# EAGLE board SCH (EAGLE 9.6.2)
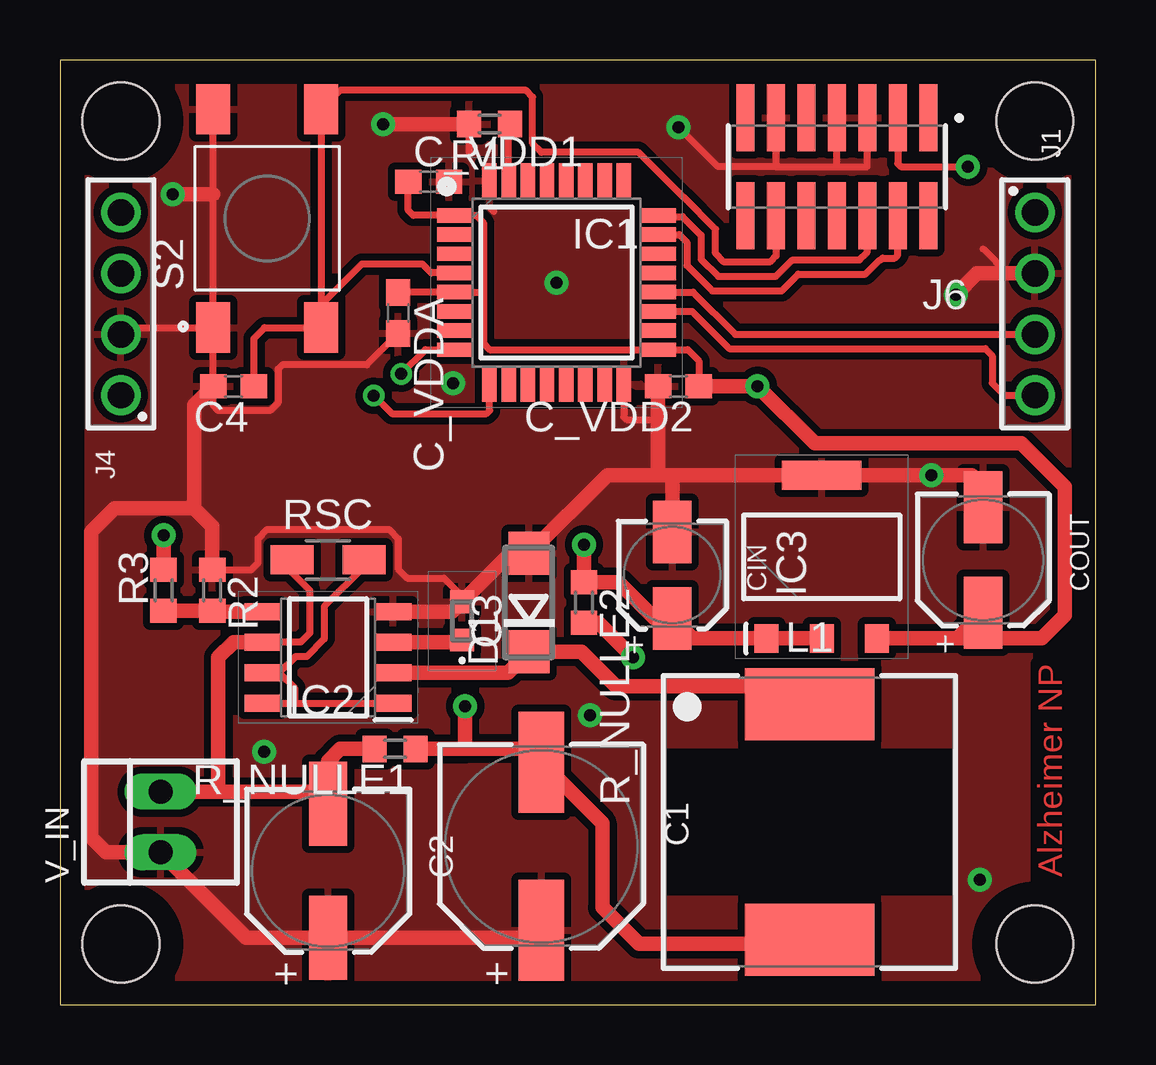
[diagram p0: board, top side]
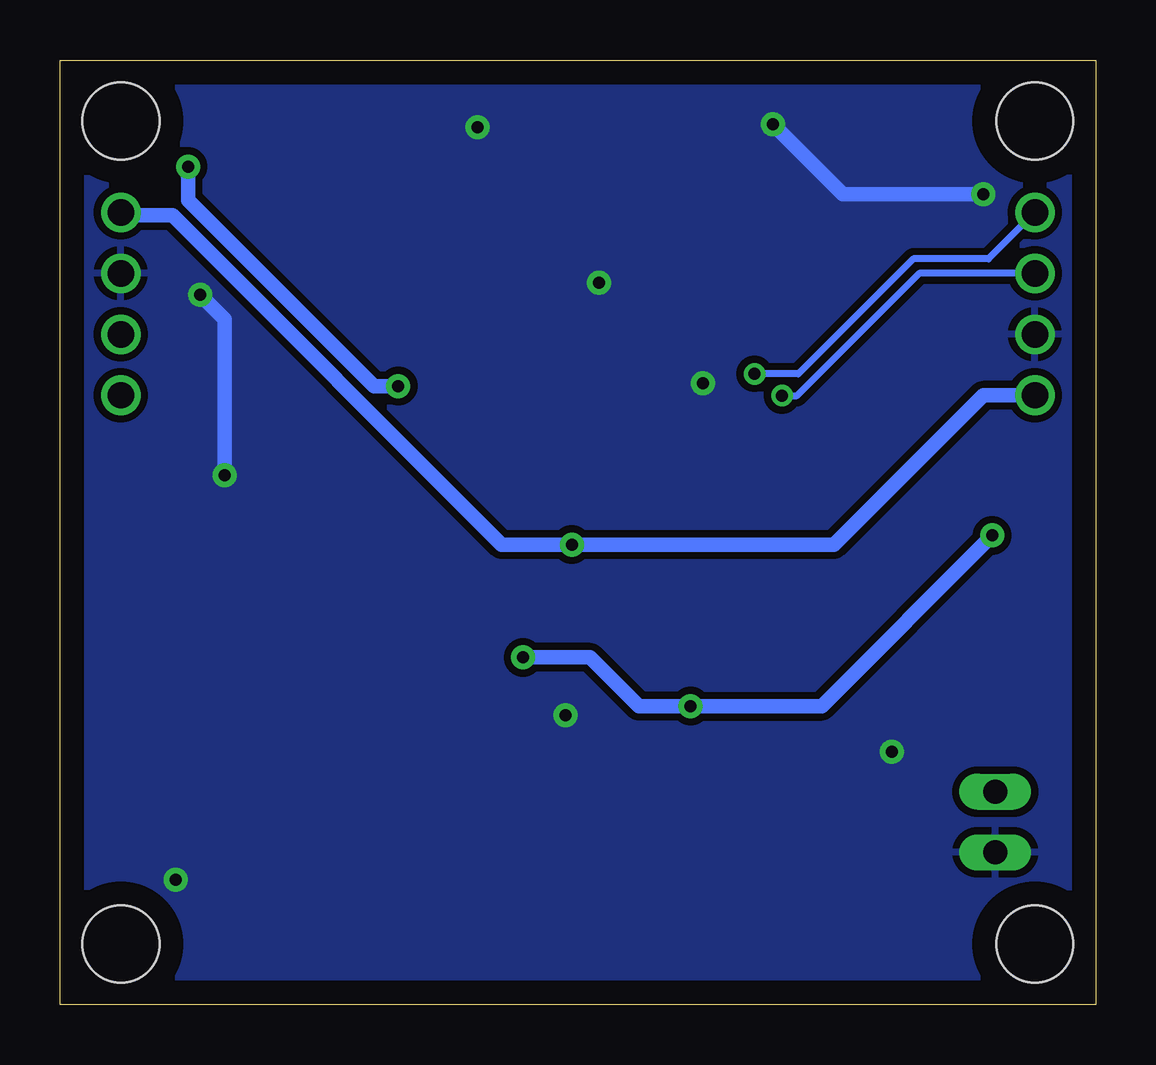
[diagram p1: board, bottom side, seen from below]

Size 43.18 x 39.37 mm. Coordinates in mm from the lower left corner, seen from the top.
Outline: 0,0 43.18,0 43.18,39.37 0,39.37 0,0
Copper layers (1*16): Top 0.035mm / dielectric 1.5mm / Bottom 0.035mm
Design rules "ENSEA_2022_04_08 *": minimum track width 0.3mm, minimum drill 0.5mm, track to track 0.3mm, track to pad 0.3mm, pad to pad 0.3mm, via to via 0.3mm, smd to smd 0.3mm, copper to edge 1mm, drill to drill 0.4mm, minimum pad ring 0.2mm, minimum via ring 0.2mm, stop-mask expansion 4mil, vias tented up to drill 0mil, thermal gap 0.3mm
Holes 3.2 mm at 2.54,2.54 40.64,2.54 40.64,36.83 2.54,36.83

## Footprints (pad centres in the part's own frame; a part is rotated, then mirrored left to right if it is on the bottom)
WCAP-ASLL_8X10.5(DXL) = smd 4.2 x 1.9: 1 3.5,0; 2 -3.5,0
WCAP-ASLL_6.3X7.7(DXL) = smd 3.5 x 1.6: 1 2.8,0; 2 -2.8,0
C0603 = smd 0.95 x 1: 1 -0.8,0; 2 0.8,0
C0603' = smd 1.1 x 1: 1 -0.85,0; 2 0.85,0
WCAP-ASLL_4X5.5(DXL) = smd 2.6 x 1.6: 1 1.8,0; 2 -1.8,0
WCAP-ASLL_5X5.5(DXL) = smd 3 x 1.6: 1 2.2,0; 2 -2.2,0
DO214AC = smd 1.8 x 1.7: A 2.05,0; C -2.05,0
QFP80P900X900X160-32N = smd 1.475 x 0.6: 1 -4.238,2.8; 2 -4.238,2; 3 -4.238,1.2; 4 -4.238,0.4; 5 -4.238,-0.4; 6 -4.238,-1.2; 7 -4.238,-2; 8 -4.238,-2.8; 17 4.238,-2.8; 18 4.238,-2; 19 4.238,-1.2; 20 4.238,-0.4; 21 4.238,0.4; 22 4.238,1.2; 23 4.238,2; 24 4.238,2.8 | smd 0.6 x 1.475: 9 -2.8,-4.238; 10 -2,-4.238; 11 -1.2,-4.238; 12 -0.4,-4.238; 13 0.4,-4.238; 14 1.2,-4.238; 15 2,-4.238; 16 2.8,-4.238; 25 2.8,4.238; 26 2,4.238; 27 1.2,4.238; 28 0.4,4.238; 29 -0.4,4.238; 30 -1.2,4.238; 31 -2,4.238; 32 -2.8,4.238
SOIC127P600X175-8N = smd 1.525 x 0.7: 1 -2.712,1.905; 2 -2.712,0.635; 3 -2.712,-0.635; 4 -2.712,-1.905; 5 2.712,-1.905; 6 2.712,-0.635; 7 2.712,0.635; 8 2.712,1.905
SOT230P700X175-4N = smd 1.2 x 1: 1 -3.4,2.3; 2 -3.4,0; 3 -3.4,-2.3 | smd 1.2 x 3.3: 4 3.4,0
61300411121 = drill 1.1: 1 -3.81,0; 2 -1.27,0; 3 1.27,0; 4 3.81,0
SAMTEC_FTSH-107-01-L-DV = smd 0.74 x 2.79: 01 -3.81,-2.035; 02 -3.81,2.035; 03 -2.54,-2.035; 04 -2.54,2.035; 05 -1.27,-2.035; 06 -1.27,2.035; 07 0,-2.035; 08 0,2.035; 09 1.27,-2.035; 10 1.27,2.035; 11 2.54,-2.035; 12 2.54,2.035; 13 3.81,-2.035; 14 3.81,2.035
WE-PDA_1260 = smd 5.4 x 3: 1 0,4.9; 2 0,-4.9
R0603 = smd 1 x 1.1: 1 -0.85,0; 2 0.85,0
R1206W = smd 1.8 x 1.2: 1 -1.499,0; 2 1.499,0
SW_2-1437565-7 = smd 2.1 x 1.4: 1 -4.55,2.25; 2 4.55,2.25; 3 -4.55,-2.25; 4 4.55,-2.25
22-23-2021 = drill 1 long: 1 -1.27,0; 2 1.27,0

## Placement (x,y rotation side)
C1  470 µF  [WCAP-ASLL_8X10.5(DXL)]  20.07,6.6 270 top
C2  100 µF  [WCAP-ASLL_6.3X7.7(DXL)]  11.18,5.59 270 top
C3  C0603C471J5GACTU  [C0603]  16.76,16 90 top
C4  0.1uF  [C0603']  7.24,25.78 180 top
C_VDD1  100nF  [C0603']  15.37,34.29 0 top
C_VDD2  100nF  [C0603']  25.78,25.78 180 top
C_VDDA  100nF  [C0603']  14.1,28.83 270 top
CIN  10 µF  [WCAP-ASLL_4X5.5(DXL)]  25.53,17.91 270 top
COUT  22 µF  [WCAP-ASLL_5X5.5(DXL)]  38.48,18.54 270 top
D1  [DO214AC]  19.56,16.76 90 top
IC1  STM32L412KBT6  [QFP80P900X900X160-32N]  20.7,30.1 0 top
IC2  MC34063ACD-TR  [SOIC127P600X175-8N]  11.18,14.48 180 top
IC3  NCV33375ST3.3T3G  [SOT230P700X175-4N]  31.75,18.67 90 top
J1  61300411121  [61300411121]  40.64,29.21 270 top
J4  61300411121  [61300411121]  2.54,29.21 90 top
J6  FTSH-107-01-L-DV  [SAMTEC_FTSH-107-01-L-DV]  32.38,34.92 180 top
L1  220uH  [WE-PDA_1260]  31.24,7.62 0 top
R1  100k  [R0603]  17.91,36.7 180 top
R2  1.2K  [R0603]  6.35,17.27 270 top
R3  3.6K  [R0603]  4.32,17.27 90 top
R_NULLE1  0  [R0603]  13.97,10.67 180 top
R_NULLE2  0  [R0603]  21.84,16.76 270 top
RSC  0.33  [R1206W]  11.18,18.54 0 top
S2  2-1437565-7  [SW_2-1437565-7]  8.64,32.77 90 top
V_IN  22-23-2021  [22-23-2021]  4.19,7.62 90 top

## Library data of the parts
C1 = C1; DATASHEET-URL: https://www.we-online.com/catalog/datasheet/865060353009.pdf; DF: 16%; DIAMETER: 8mm; I-LEAK: 75.2uA; I-RIPPLE: 600mA; L: 10.5mm; OPERATING-TEMPERATURE: -55 °C up to +105 °C; PART-NUMBER: 865060353009; TECHNICAL-REFERENCE: ASEE105471M016DVCTEE000; VR: 16V(DC); Z: 0.17Ohm
C2 = C2; DATASHEET-URL: https://www.we-online.com/catalog/datasheet/865060445005.pdf; DF: 14%; DIAMETER: 6.3mm; I-LEAK: 25uA; I-RIPPLE: 300mA; L: 7.7mm; OPERATING-TEMPERATURE: -55 °C up to +105 °C; PART-NUMBER: 865060445005; TECHNICAL-REFERENCE: ASED077101M025DVCTCB000; VR: 25V(DC); Z: 0.36Ohm
C3 = C3; ARROW_PART_NUMBER: C0603C471J5GACTU; ARROW_PRICE-STOCK: https://www.arrow.com/en/products/c0603c471j5gactu/kemet-corporation?region=nac; DESCRIPTION: SMD Comm C0G, Ceramic, 470 pF, 5%, 50 VDC, 125 VDC, 125?C, -55?C, C0G, SMD, MLCC, Ultra-Stable, Low Loss, Class I, 0.1 % , 100 GOhms, 3.7 mg, 0603, 1.6mm, 0.8mm, 0.8mm, 0.7mm, 0.35mm, 4000, 78 Weeks, 120; HEIGHT: 0.87mm; MANUFACTURER_NAME: KEMET; MANUFACTURER_PART_NUMBER: C0603C471J5GACTU; MOUSER_PART_NUMBER: 80-C0603C471J5G; MOUSER_PRICE-STOCK: https://www.mouser.co.uk/ProductDetail/KEMET/C0603C471J5GACTU?qs=6Zy9Yzz7FWCvDjERNKhvPg%3D%3D
C4 C_VDD1 C_VDD2 C_VDDA = rcl; SPICEPREFIX: C
CIN = Cin; DATASHEET-URL: https://www.we-online.com/catalog/datasheet/865060440001.pdf; DF: 14%; DIAMETER: 4mm; I-LEAK: 3uA; I-RIPPLE: 90mA; L: 5.5mm; OPERATING-TEMPERATURE: -55 °C up to +105 °C; PART-NUMBER: 865060440001; TECHNICAL-REFERENCE: ASEB055100M025DVCTAB000; VR: 25V(DC); Z: 1.35Ohm
COUT = Cout; DATASHEET-URL: https://www.we-online.com/catalog/datasheet/865060442002.pdf; DF: 14%; DIAMETER: 5mm; I-LEAK: 5.5uA; I-RIPPLE: 150mA; L: 5.5mm; OPERATING-TEMPERATURE: -55 °C up to +105 °C; PART-NUMBER: 865060442002; TECHNICAL-REFERENCE: ASEC055220M025DVCTBB000; VR: 25V(DC); Z: 0.8Ohm
D1 = diode
IC1 = STM32_librairy; DESCRIPTION: ARM Microcontrollers - MCU Ultra-low-power Arm Cortex -M4 32-bit MCU+FPU, 100DMIPS up to 128KB Flash, 40KB SRAM, analog, ext. SMPS; HEIGHT: 1.6mm; MANUFACTURER_NAME: STMicroelectronics; MANUFACTURER_PART_NUMBER: STM32L412KBT6; MOUSER_PART_NUMBER: 511-STM32L412KBT6; MOUSER_PRICE-STOCK: https://www.mouser.co.uk/ProductDetail/STMicroelectronics/STM32L412KBT6?qs=%252BEew9%252B0nqrD6o08jV%2F00TA%3D%3D
IC2 = SamacSys_Parts; DESCRIPTION: MC34063ACD-TR, DC-DC Controller, 40 V, 8-Pin, SOIC; HEIGHT: 1.75mm; MANUFACTURER_NAME: STMicroelectronics; MANUFACTURER_PART_NUMBER: MC34063ACD-TR; MOUSER_PART_NUMBER: 511-MC34063ACD-TR; MOUSER_PRICE-STOCK: https://www.mouser.co.uk/ProductDetail/STMicroelectronics/MC34063ACD-TR?qs=zDcCjb1ShEnlEhOFqqejBw%3D%3D
IC3 = SamacSys_Parts; DESCRIPTION: ON SEMICONDUCTOR - NCV33375ST3.3T3G - Fixed LDO Voltage Regulator, 4.3V to 13V, 260mV Dropout, 3.3Vout, 300mAout, SOT-223-4; HEIGHT: 1.75mm; MANUFACTURER_NAME: onsemi; MANUFACTURER_PART_NUMBER: NCV33375ST3.3T3G; MOUSER_PART_NUMBER: 863-NCV33375ST3.3T3G; MOUSER_PRICE-STOCK: https://www.mouser.co.uk/ProductDetail/ON-Semiconductor/NCV33375ST33T3G?qs=Pqj8oIac8rWOl%252BM3OwXrOg%3D%3D
J1 J4 = Eagle_WR-PHD (rev21a); DATASHEET-URL: https://www.we-online.com/catalog/datasheet/61300411121.pdf; GENDER: Pin Header; IR: 3A; MOUNT: THT; PACKAGING: Bag; PART-NUMBER: 61300411121; PINS: 4; PITCH: 2.54mm; ROWS: Single; TYPE: Straight
J6 = FTSH-107-01-L-DV; MANUFACTURER: Samtec; PARTREV: R; STANDARD: Manufacturer Recommendations
L1 = L; DATASHEET-URL: https://www.we-online.com/catalog/datasheet/784771221.pdf; FRES: 3.9MHz; IR: 0.99A; ISAT: 1.1A; MOUNT: SMT; PART-NUMBER: 784771221; RDC-MAX: 348mOhm; RDC-TYP: 290mOhm
R1-R3 R_NULLE1 R_NULLE2 RSC = rcl; SPICEPREFIX: R
S2 = 2-1437565-7; AVAILABILITY: In Stock; COMMENT: 2-1437565-7; CONFIGURATION_POLE-THROW: Single Pole - Single Throw; CONTACT_CURRENT_RATING: 50 mA; DESCRIPTION: Tactile Switch SPST-NO Top Actuated Surface Mount; MF: TE Connectivity; MP: FSM2JSMA; PACKAGE: None; PRICE: None; PURCHASE-URL: https://pricing.snapeda.com/search/part/FSM2JSMA/?ref=eda
V_IN = con-molex; MF: MOLEX; MPN: 22-23-2021; OC_FARNELL: 1462926; OC_NEWARK: 25C3832

## Nets
GND: C1.1 C2.1 C3.2 C4.2 C_VDD1.2 C_VDD2.2 C_VDDA.2 CIN.2 COUT.2 D1.A IC1.16 IC1.32 IC2.4 IC3.4 J1.2 J4.2 J6.05 J6.07 J6.11 R1.2 R2.1 S2.1 S2.2 V_IN.1
N$1: IC1.31 R1.1
N$2: IC2.1 IC2.7 IC2.8 RSC.2
N$3: IC2.5 R2.2 R3.1
N$5: C3.1 IC2.3
N$6: D1.C IC2.2 L1.1
NRST: C4.1 IC1.4 J6.12 S2.3 S2.4
SWCLK: IC1.24 J6.06
SWDIO: IC1.23 J6.04
USART1_RX: IC1.20 J1.3
USART1_TX: IC1.19 J1.4
USART2_RX: IC1.9 J4.3
USART2_TX: IC1.8 J4.4
VCC_3V: C_VDD1.1 C_VDD2.1 C_VDDA.1 COUT.1 IC1.1 IC1.5 IC1.17 IC3.3 J6.03
VCC_5V: CIN.1 IC3.1 IC3.2 J1.1 J4.1 R_NULLE2.1
VCC_5V_IN: C1.2 L1.2 R3.2 R_NULLE1.1 R_NULLE2.2
VCC_6V: C2.2 IC2.6 R_NULLE1.2 RSC.1 V_IN.2

## Tracks (layer width: path | path; a pad name or v marks a point on that pad's centre or on a via)
GND  (via drill 0.5 pad 1)
  Top 0.3: R2.1 7.96,18.12 8.26,18.41 8.26,19.43 8.64,19.81 13.72,19.81 14.1,19.43 14.1,18.16 14.48,17.78 16,17.78 16.76,17.02 C3.2 | S2.1 C4.2 6.39,24.98 6.6,24.77 8.76,24.77 9.09,25.09 9.09,26.49 9.27,26.67 12.79,26.67 C_VDDA.2 | J4.2 2.82,28.22 S2.1 | R1.2 17.06,35.51 | IC1.16 23.5,24.5 23.62,24.38 24.77,24.38 24.93,24.55 C_VDD2.2 | S2.1 6.39,33.78 S2.2 | J6.11 29.84,34.92 | 29.84,34.92 29.97,34.92 32.38,34.92 | 32.38,34.92 J6.07 | 32.38,34.92 33.66,34.92 J6.05 | 38.48,31.5 39.5,30.48 J1.2 | 17.95,33.19 18.08,33.06 | 29.84,34.92 27.43,34.92 v25.78,36.58
  Top 0.6: C1.1 19.75,2.79 C2.1 7.75,2.79 V_IN.1 1.94,6.35 1.3,6.99 1.3,19.71 2.29,20.7 5.59,20.7 | IC2.4 16.34,16.38 C3.2 18.78,18.81 D1.A 22.81,22.07 24.89,22.07 | 5.59,20.7 6.35,19.94 R2.1 | 25.62,22.07 IC3.4 v36.32,22.07 38,22.07 38.48,21.59 COUT.2 | 25.62,22.07 25.53,21.97 CIN.2 | 24.89,22.07 25.62,22.07 | C_VDD2.2 24.93,22.11 24.89,22.07 | 5.59,20.7 5.59,24.99 C4.2 | J1.2 38.23,30.48 v37.34,29.59 | R1.2 v13.46,36.7 | 6.39,33.78 v4.7,33.78
  Bottom 0.6: v37.34,29.59 36.32,28.57 v36.32,22.07 | v4.7,33.78 10.54,33.78 v13.46,36.7
  other vias: 38.35,5.21 8.51,10.54 22.1,12.06 16.38,25.91 20.7,30.1
  pour Bottom: 0,0 43.18,0 43.18,39.37 0,39.37
  pour Top: 0,0 43.18,0 43.18,39.37 0,39.37
N$1
  Top 0.3: IC1.31 18.7,36.65 R1.1
N$2
  Top 0.3: RSC.2 12.68,18.26 11.01,16.6 11.01,15.24 10.28,14.51 9.81,14.51 9.14,13.84 | IC2.8 9.78,12.57 | 9.78,12.57 IC2.1 | IC2.7 9.14,13.84 | 9.78,12.57 9.78,13.21 9.14,13.84
N$3
  Top 0.6: IC2.5 6.39,16.38 R2.2 R3.1
N$5
  Top 0.6: IC2.3 16.68,15.11 C3.1
N$6
  Top 0.6: IC2.2 18.69,13.84 D1.C 21.73,14.71 23.17,13.28 30.48,13.28 L1.1
NRST
  Top 0.3: C4.1 8.09,27.77 8.53,28.22 S2.3 | IC1.4 15.47,30.5 15.11,30.86 12.57,30.86 10.89,29.17 S2.3 | S2.3 S2.4 11.67,38.1 19.43,38.1 19.71,37.82 19.71,35.88 20.07,35.52 24.11,35.52 25.99,33.65 26,33.65 27.33,32.32 27.33,31.31 27.69,30.95 29.59,30.95 29.84,31.21 J6.12
SWCLK
  Top 0.3: IC1.24 24.99,32.85 25.95,32.85 26.73,32.08 26.73,31.06 27.44,30.35 29.84,30.35 30.53,31.05 33.33,31.05 33.66,31.37 33.66,31.64 33.66,32.26 J6.06
SWDIO
  Top 0.3: IC1.23 25.81,32.1 26.13,31.79 26.13,30.82 27.19,29.75 30.09,29.75 30.78,30.45 33.58,30.45 34.18,31.05 34.21,31.05 34.28,31.11 34.8,31.11 34.92,31.24 J6.04
USART1_RX
  Top 0.3: J1.3 28.15,27.94 26.39,29.7 IC1.20
USART1_TX
  Top 0.3: IC1.19 26.35,28.9 27.91,27.34 38.57,27.34 38.86,27.05 38.86,25.91 39.37,25.4 J1.4
USART2_RX  (via drill 0.5)
  Top 0.3: v13.08,25.39 13.09,25.39 13.84,24.64 17.78,24.64 17.91,24.77 IC1.9
  Bottom 0.3: J4.3 7.37,30.48 11.24,26.61 12.46,25.39 v13.08,25.39
USART2_TX  (via drill 0.5)
  Top 0.3: v14.22,26.29 15.23,27.3 IC1.8
  Bottom 0.3: J4.4 4.48,31.08 7.62,31.08 12.41,26.29 v14.22,26.29
VCC_3V  (via drill 0.5 pad 1)
  Top 0.3: C_VDD1.1 14.52,33.11 14.73,32.9 IC1.1 17.34,32.9 17.65,32.59 17.65,29.72 | C_VDDA.1 14.12,29.7 IC1.5 17.63,29.7 17.65,29.72 | C_VDD2.1 26.63,26.84 26.17,27.3 IC1.17 17.91,27.3 17.65,27.56 17.65,29.72 | J6.03 34.92,35.05 35.05,34.92 v37.85,34.92
  Top 0.6: IC3.3 37.41,15.27 | 37.41,15.27 COUT.1 | 37.41,15.27 40.92,15.27 41.88,16.23 41.88,21.59 40.07,23.4 31.47,23.4 v29.08,25.78 C_VDD2.1
  Bottom 0.6: v29.08,25.78 30.1,25.78 37.85,33.53 v37.85,34.92
VCC_5V  (via drill 0.5 pad 1)
  Top 0.6: IC3.2 IC3.1 26.36,15.27 CIN.1 24.79,16.11 23.28,17.61 R_NULLE2.1 v21.84,19.18
  Bottom 0.6: J4.1 4.7,25.4 10.92,19.18 v21.84,19.18 24.77,19.18 38.48,32.89 40.51,32.89 J1.1
VCC_5V_IN  (via drill 0.5 pad 1)
  Top 0.6: R_NULLE1.1 16.89,10.67 | 16.89,10.67 19.5,10.67 C1.2 22.61,7.56 22.61,4.06 24.13,2.54 31.06,2.54 L1.2 | 16.89,10.67 v16.89,12.45 | v4.32,19.56 R3.2 | v23.88,14.48 22.44,15.91 R_NULLE2.2
  Bottom 0.6: v4.32,19.56 11.43,12.45 v16.89,12.45 19.05,12.45 21.08,14.48 v23.88,14.48
VCC_6V
  Top 0.3: RSC.1 9.68,18.01 10.41,17.27 10.41,15.49 10.03,15.11 IC2.6
  Top 0.6: V_IN.2 6.6,8.89 | 6.6,8.89 10.67,8.89 C2.2 11.18,10.16 11.68,10.67 R_NULLE1.2 | IC2.6 7.24,15.11 6.6,14.48 6.6,8.89

## Text on the board
Top: Alzheimer NP